# Altium PCB OPG_v8_pcb.PcbDoc (part 2 of 3)
Units mm, origin at the board's own origin, x right, y up, seen from the top; angles counter-clockwise.
Board outline 65 x 95 mm, 2 copper layers (Top Layer, Bottom Layer), stack 0.081 mm thick; 16 components, 17 nets, 129 pads, 66 vias.
Unrouted connection lines stored in the file: 30.
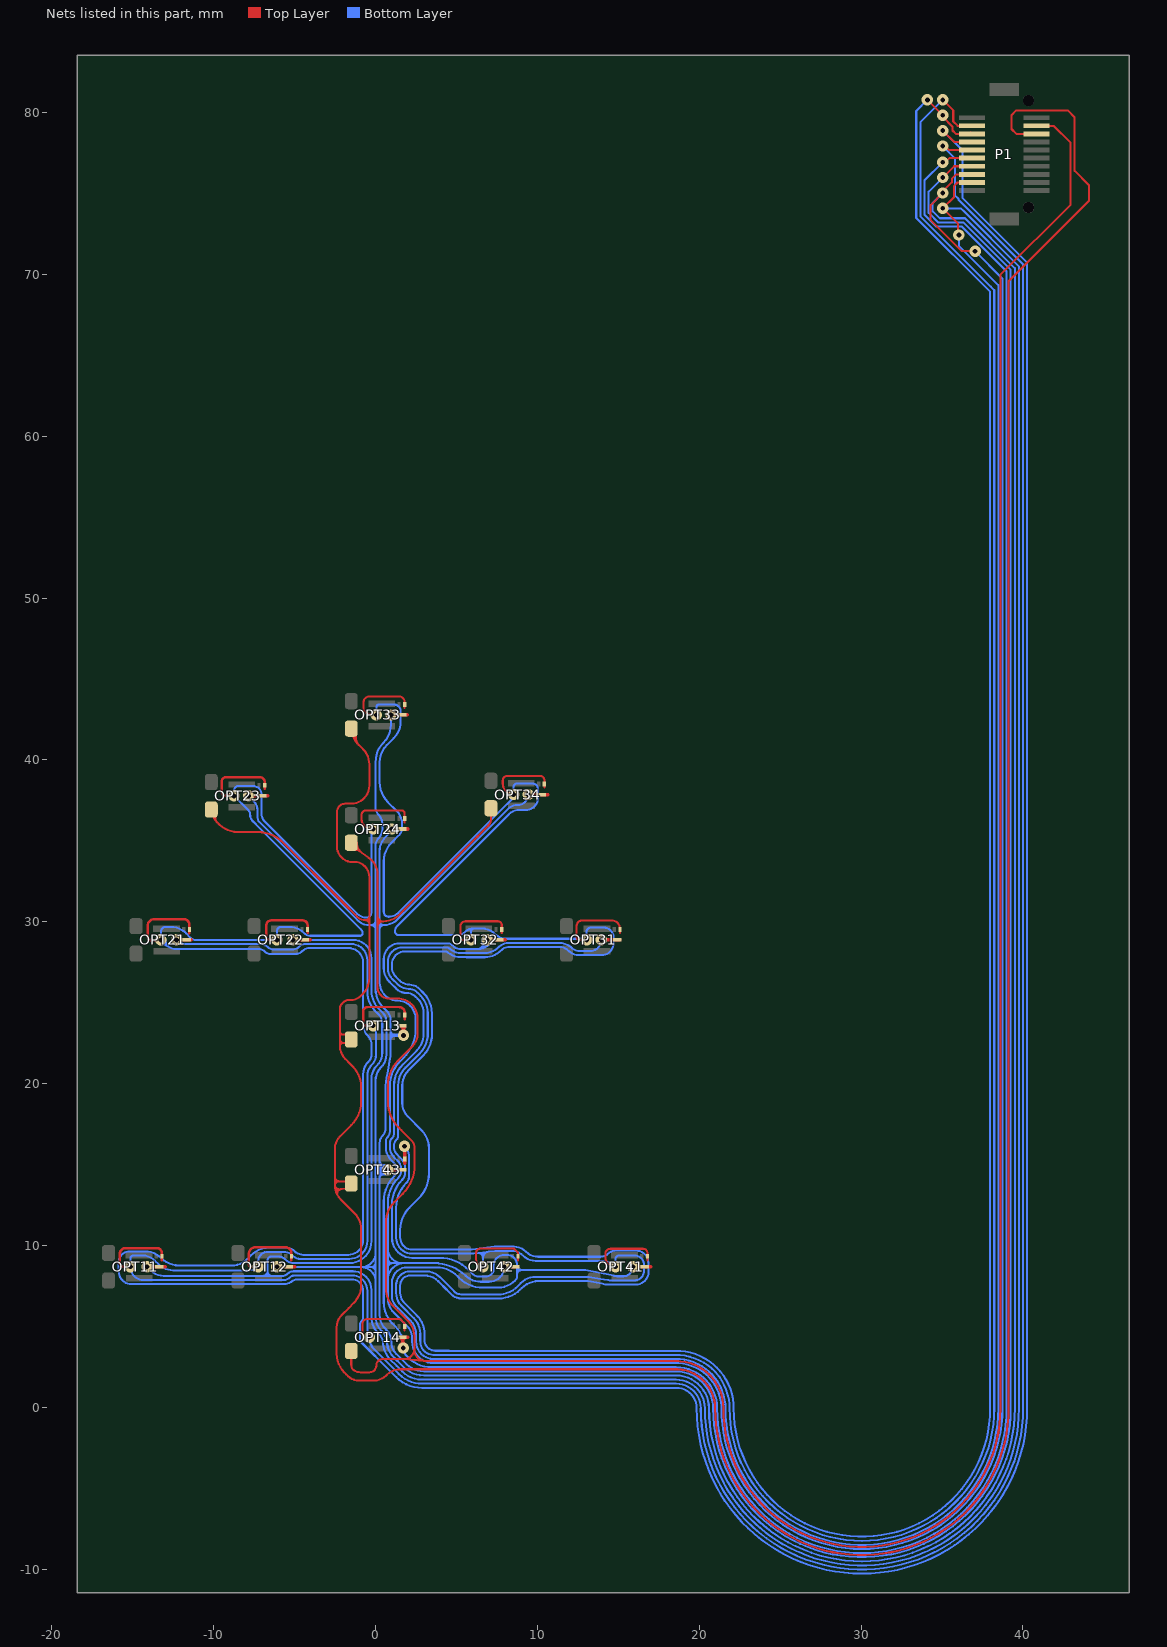
[diagram p2: the nets of this part, all layers, seen from the top]

## Via types
v1: diameter 0.7, hole 0.3, Top Layer to Bottom Layer, 49 vias
v2: diameter 0.7/0.5 (per signal layer), hole 0.3, Top Layer to Bottom Layer, 17 vias

## Nets (pads, with @x,y where several pads share a name; then routed paths per layer and width w, separated by ;. In a path a pad name is that pad's centre, name@x,y a point inside that pad or via, vN(x,y) a via of type N, cw(c..) or ccw(c..) an arc to the next point about the centre after c; other vN are vias at no path point) (continued)
LED_OUT_col3: OPT13.S2 OPT23.S2 OPT33.S2 OPT43.S2 P1.18 | length 209.5
  Top Layer w0.127: OPT23.S2@-10.15,37.03 ccw(c-8.895,37.03) -9.782,36.142 ; OPT23.S2@-9.98,36.86 OPT23.S2@-9.897,36.777 ; OPT23.S2@-9.896,36.592 -9.896,36.416 ccw(c-9.509,36.416) -9.782,36.142 ; -7.039,35.53 cw(c-7.04,35.403) -7.025,35.529 cw(c-7.3,33.301) -6.831,35.496 ; -2.211,16.719 ccw(c-1.5,16.01) -2.504,16.01 -2.504,14.21 ; -2.21,16.72 -1.504,17.426 ; -1.977,25.038 -2.088,24.926 ccw(c-1.819,24.657) -2.2,24.657 -2.2,23.22 ; -1.976,25.039 cw(c-1.682,24.744) -1.682,25.16 -1.515,25.16 ccw(c-1.515,25.969) -0.943,25.397 -0.777,25.563 ccw(c-1.729,26.517) -0.775,25.565 ccw(c-1.729,26.517) -0.381,26.517 -0.381,29.838 ; -1.872,21.522 -1.545,21.194 -1.425,21.075 ; -1.873,21.523 cw(c-1.081,22.314) -2.2,22.314 ; OPT13.S2@-1.74,23.035 -2.016,23.035 ; -1.503,17.427 ccw(c-2.989,18.911) -0.889,18.911 -0.889,19.781 ccw(c-2.719,19.781) -1.424,21.074 ; OPT43.S2@-1.5,13.83 -1.7,13.53 -2.088,13.481 ccw(c-2.088,13.197) -2.158,13.472 ; OPT43.S2@-1.5,13.93 ccw(c-1.577,13.853) -1.577,13.962 -2.256,13.962 ; OPT13.S2@-1.5,22.73 -1.7,22.517 -1.993,22.517 ; OPT33.S2@-1.5,42.03 ccw(c0.045,42.03) -1.204,41.12 ; OPT33.S2@-1.3,41.63 -1.246,41.342 -1.204,41.12 ; OPT33.S2@-1.217,41.65 -1.217,41.347 ccw(c-0.637,41.347) -1.047,40.937 ; -0.617,30.096 cw(c-0.62,30.335) -0.62,30.096 cw(c-0.62,30.615) -0.627,30.096 ; -0.617,30.096 ccw(c-0.62,30.335) -0.381,30.335 ; 0.705,2.006 0.665,1.966 cw(c-0.091,2.719) 0.663,1.964 cw(c-0.091,2.719) -0.091,1.652 -1.034,1.652 cw(c-1.034,2.607) -1.708,1.931 cw(c-1.034,2.607) -1.71,1.933 cw(c-1.034,2.607) -1.712,1.934 -1.813,2.036 -1.914,2.136 cw(c-0.743,3.309) -1.916,2.138 cw(c-0.743,3.309) -2.4,3.309 -2.4,4.928 cw(c-1.278,4.926) -2.071,5.72 -1.667,6.123 -1.34,6.451 ccw(c-2.416,7.535) -1.253,6.545 ccw(c-2.416,7.535) -0.972,7.037 ccw(c-2.416,7.535) -0.916,7.249 ccw(c-2.416,7.535) -0.897,7.376 ccw(c-2.608,7.54) -0.889,7.54 -0.889,11 ccw(c-2.287,11) -1.3,11.99 -2.15,12.84 cw(c-1.295,13.695) -2.371,13.144 ; 0.705,2.006 cw(c1.53,1.181) 1.53,2.347 4.579,2.347 ; 4.585,2.348 17.55,2.347 18.667,2.347 ccw(c18.695,2.471) 18.688,2.344 cw(c18.566,-0.072) 20.985,-0.072 ccw(c30.053,-0.072) 39.121,-0.072 39.121,69.593 44.087,74.559 44.087,75.511 43.201,76.397 43.201,79.695 42.762,80.134 39.597,80.134 39.297,79.834 39.297,78.984 39.597,78.684 P1.18@40.85,78.684 ; -9.782,36.142 -9.65,36.01 ccw(c-8.53,37.13) -8.53,35.546 -7.302,35.546 cw(c-7.3,33.301) -5.71,34.886 -2.074,31.249 -1.135,30.31 ccw(c-0.617,30.828) -0.64,30.096 cw(c-0.64,29.838) -0.627,30.096 ; -2.504,13.714 ccw(c-2.257,13.714) -2.257,13.467 -2.201,13.467 -2.158,13.472 ; -2.504,13.714 cw(c-2.256,13.714) -2.256,13.962 ; -2.504,13.714 -2.504,13.695 ccw(c-1.295,13.695) -2.475,13.432 ; -2.504,13.714 -2.504,13.962 ; -2.504,13.962 -2.504,14.21 ; -2.504,13.962 -2.256,13.962 ; -2.504,14.21 ccw(c-2.256,14.21) -2.256,13.962 ; -2.475,13.432 ccw(c-1.295,13.695) -2.371,13.144 ; -2.475,13.432 -2.312,13.453 ccw(c-2.257,13.352) -2.371,13.352 -2.371,13.197 ; -2.371,13.144 -2.371,13.197 ; -2.371,13.197 cw(c-2.088,13.197) -2.158,13.472 ; -2.2,22.314 cw(c-1.997,22.314) -1.997,22.517 ; -2.2,22.314 -2.2,22.517 ; -2.2,22.517 -2.2,22.723 ; -2.2,22.517 -1.997,22.517 ; -2.2,22.723 ccw(c-1.993,22.723) -1.997,22.517 ; -2.2,22.723 -2.2,22.93 ; -2.2,22.93 cw(c-2.095,22.93) -2.095,23.035 -2.016,23.035 ; -2.2,22.93 -2.2,23.22 ; -2.2,23.22 ccw(c-2.016,23.22) -2.016,23.035 ; -1.997,22.517 ccw(c-1.993,22.723) -1.993,22.517 ; -1.997,22.517 -1.993,22.517 ; -1.204,41.12 ccw(c0.045,42.03) -1.047,40.937 ; -1.047,40.937 -0.772,40.662 cw(c-1.717,39.718) -0.381,39.718 -0.381,38.43 cw(c-1.518,38.43) -0.711,37.629 -0.777,37.563 cw(c-0.867,37.651) -0.784,37.555 cw(c-1.531,38.43) -0.786,37.554 cw(c-1.531,38.43) -1.346,37.295 cw(c-1.365,37.42) -1.365,37.293 -1.886,37.293 ccw(c-1.887,36.796) -2.384,36.796 -2.384,34.655 ccw(c-1.421,34.655) -1.421,33.692 -1.275,33.692 cw(c-1.275,32.86) -0.688,33.449 cw(c-1.425,32.71) -0.686,33.447 cw(c-1.425,32.71) -0.666,33.427 ccw(c-0.574,33.514) -0.656,33.417 cw(c-1.319,32.754) -0.381,32.754 -0.381,30.335 ; -0.627,30.096 cw(c-0.64,29.838) -0.381,29.838 ; -0.381,29.838 -0.381,30.335
LED_OUT_col4: OPT14.S2 OPT24.S2 OPT34.S2 P1.19 | length 188
  Top Layer w0.127: OPT24.S2@-1.555,34.607 -1.554,34.614 -1.514,34.882 OPT24.S2@-1.5,34.98 ; OPT24.S2@-1.547,34.451 -1.307,34.451 cw(c-1.307,33.819) -1.03,34.387 ; OPT14.S2@-1.5,3.58 -1.5,2.618 ccw(c-1.076,2.617) -1.25,2.23 ccw(c-0.924,2.955) -0.923,2.16 ; OPT24.S2@-1.5,34.88 -1.3,34.58 -1.03,34.387 ; OPT24.S2@-1.162,34.887 ccw(c-0.391,34.887) -0.936,34.343 -0.86,34.266 ccw(c-1.307,33.819) -1.03,34.387 ; -0.923,2.16 -0.37,2.16 ccw(c-0.37,2.58) 0.05,2.58 cw(c0.45,2.58) 0.45,2.98 1.75,2.98 ; 1.421,17.29 1.415,17.296 cw(c2.984,18.87) 1.411,17.301 cw(c2.984,18.87) 0.762,18.87 0.762,19.86 cw(c3.014,19.86) 1.381,21.411 ccw(c1.29,21.499) 1.385,21.415 cw(c1.943,20.897) 1.403,21.434 cw(c1.943,20.897) 1.406,21.437 2.284,22.314 ccw(c1.514,23.086) 2.286,22.316 ccw(c1.514,23.086) 2.604,23.086 2.604,24.01 ccw(c1.36,24.01) 2.24,24.89 ; 1.421,17.29 1.587,17.124 2.202,16.509 cw(c1.693,16) 2.413,16 2.413,14.963 cw(c-0.091,14.963) 1.68,13.193 1.157,12.67 ccw(c2.418,11.409) 0.635,11.409 0.635,7.244 ccw(c0.762,7.244) 0.636,7.231 0.639,7.2 cw(c0.513,7.186) 0.639,7.197 ccw(c2.088,7.308) 1.062,6.279 1.494,5.847 ccw(c1.675,6.025) 1.497,5.844 1.57,5.771 1.644,5.698 2.022,5.319 cw(c1.109,4.406) 2.4,4.406 2.4,3.63 ; 2.239,24.89 ccw(c1.36,24.01) 1.836,25.159 cw(c1.886,25.276) 1.832,25.161 ccw(c1.45,24.38) 1.471,25.249 cw(c1.475,25.376) 1.465,25.25 ccw(c1.36,24.01) 1.36,25.254 0.822,25.254 cw(c0.822,25.949) 0.127,25.949 0.127,29.685 ; 6.267,35.234 cw(c6.448,35.056) 6.269,35.236 6.43,35.397 6.965,35.932 ccw(c6.567,36.33) 7.13,36.33 OPT34.S2@7.13,37.01 OPT34.S2@7.13,37.11 ; 18.053,2.864 18.557,2.857 ; P1.19@40.85,79.184 41.892,79.184 42.947,78.129 42.947,74.315 38.613,69.981 38.613,-0.072 cw(c30.053,-0.072) 21.493,-0.072 ccw(c18.566,-0.072) 18.857,2.841 18.725,2.854 ccw(c18.699,2.601) 18.714,2.855 18.557,2.864 17.55,2.864 4.585,2.864 3.067,2.864 ; -1.03,34.387 -0.86,34.266 -0.419,33.952 ; -0.419,33.952 cw(c-1.229,32.811) -0.241,33.802 ; -0.419,33.952 -0.417,33.95 cw(c-1.229,32.811) -0.241,33.802 ; -0.241,33.802 cw(c-1.229,32.811) -0.238,33.799 ; -0.241,33.802 -0.238,33.799 ; -0.238,33.799 cw(c-1.116,32.919) 0.127,32.919 0.127,30.358 ; 0.127,29.685 cw(c0.462,29.685) 0.462,30.02 ; 0.127,29.685 0.127,30.02 ; 0.127,30.02 0.462,30.02 ; 0.127,30.02 0.127,30.358 ; 0.127,30.358 ccw(c0.465,30.358) 0.462,30.02 ; 0.462,30.02 ccw(c0.465,30.358) 0.465,30.02 ; 0.462,30.02 ccw(c0.462,31.448) 0.465,30.02 ; 0.462,30.02 0.465,30.02 ; 0.465,30.02 ccw(c0.465,30.837) 0.479,30.02 ; 0.465,30.02 ccw(c0.462,31.448) 0.479,30.02 ; 0.479,30.02 ccw(c0.462,31.448) 1.472,30.438 5.95,34.916 6.266,35.232 ; 1.75,2.98 ccw(c1.75,3.63) 2.4,3.63 ; 1.75,2.98 2.951,2.875 ; 2.4,3.63 2.4,3.532 ccw(c3.067,3.532) 2.951,2.875 ; 2.951,2.875 ccw(c3.067,3.532) 3.067,2.864 ; 2.951,2.875 3.067,2.864 ; 6.266,35.232 ccw(c5.15,36.35) 6.267,35.234 6.266,35.232
PD_col1: OPT11.D OPT21.D OPT31.D OPT41.D P1.9 | length 384.1
  Top Layer w0.127: v2(36.047,72.434) 36.001,72.48 36.001,73.13 v2(35.047,74.084) 35.747,74.784 35.747,75.469 35.957,75.679 P1.9@36.845,75.679 ; P1.9@36.764,75.598 P1.9@36.845,75.679 ; P1.9@36.85,75.684 P1.9@36.845,75.679
  Top Layer w0.22: v1(-14.118,8.68) OPT11.D@-13.375,8.68 -13,8.68 ; v1(-12.3,28.88) OPT21.D@-11.675,28.88 OPT21.D@-11.4,28.88 ; v1(13.95,28.88) OPT31.D@15.1,28.88 ; v1(15.9,8.68) OPT41.D@16.625,8.68 17,8.68
  Bottom Layer w0.127: v1(-14.118,8.68) -13.875,8.438 ccw(c-13.1,9.213) -13.1,8.116 -6.975,8.116 ; v1(-12.3,28.88) ccw(c-11.672,29.508) -11.672,28.62 -7.119,28.62 cw(c-7.119,27.963) -6.654,28.427 ccw(c-6.296,28.786) -6.296,28.279 -5.15,28.279 ccw(c-5.15,28.872) -4.731,28.453 cw(c-4.312,28.034) -4.312,28.626 -1.51,28.626 cw(c-1.51,27.624) -0.508,27.624 -0.508,25.725 ccw(c1.319,25.725) -0.062,24.529 cw(c-0.159,24.446) -0.047,24.507 0.183,24.277 cw(c-0.373,23.721) 0.414,23.721 0.414,21.916 cw(c-0.726,21.916) 0.08,21.111 ; -6.67,8.13 -6.67,8.361 ; -5.416,8.26 cw(c-5.763,8.607) -5.763,8.116 -6.425,8.116 ; -5.415,8.261 cw(c-5.069,7.913) -5.069,8.404 -1.41,8.404 cw(c-1.41,7.248) -0.254,7.248 -0.254,5.598 ; -0.254,5.597 ccw(c1.222,5.597) -0.183,5.143 ccw(c1.222,5.597) 0.179,4.553 0.197,4.534 cw(c-0.46,3.877) 0.456,4.037 cw(c0.331,4.016) 0.457,4.031 cw(c-0.336,3.939) 0.462,3.939 ccw(c0.716,3.939) 0.47,3.877 cw(c0.347,3.845) 0.473,3.86 ccw(c2.022,4.044) 0.484,3.782 ; 0.08,21.111 ccw(c0.885,20.305) -0.254,20.305 -0.254,10.258 cw(c-1.6,10.258) -1.6,8.912 -5.06,8.912 cw(c-5.06,9.583) -5.535,9.109 ccw(c-6.021,8.623) -5.795,9.272 ccw(c-6.021,8.623) -6.021,9.31 -6.44,9.31 ccw(c-6.44,9.08) -6.67,9.08 -6.67,8.421 ; 0.484,3.781 ccw(c2.022,4.044) 0.876,2.986 cw(c0.782,2.9) 0.884,2.976 1.306,2.554 1.643,2.216 ; 1.04,26.461 cw(c1.712,27.132) 0.762,27.132 0.762,27.526 cw(c1.65,27.526) 1.65,28.414 4.387,28.414 cw(c4.387,28.127) 4.59,28.33 cw(c4.54,28.213) 4.624,28.308 ccw(c5.261,29.011) 5.261,28.063 5.643,28.063 cw(c5.643,27.936) 5.66,28.061 6.698,28.061 ccw(c6.698,29.373) 7.275,28.195 ccw(c6.698,29.373) 7.625,28.446 cw(c8.23,27.841) 8.23,28.696 11.341,28.696 cw(c11.341,27.587) 12.022,28.462 ccw(c12.099,28.563) 12.05,28.446 ccw(c12.655,29.05) 12.655,28.195 13.265,28.195 ccw(c13.265,28.88) v1(13.95,28.88) ; 1.04,26.46 1.37,26.131 ccw(c2.033,26.794) 2.033,25.856 cw(c2.033,25.104) 2.565,25.636 2.785,25.415 ; 1.322,16.562 1.27,16.51 ccw(c1.577,16.203) 1.143,16.203 1.143,16.095 ccw(c1.838,16.095) 1.347,15.603 1.586,15.364 cw(c1.008,14.785) 1.826,14.785 1.826,14.488 cw(c1.218,14.488) 1.649,14.059 ccw(c3.174,12.532) 1.016,12.532 1.016,10.468 ccw(c2.25,10.468) 2.25,9.234 3.946,9.234 cw(c3.946,6.694) 5.742,8.49 5.974,8.259 ccw(c6.375,8.635) 6.375,8.085 6.825,8.085 ccw(c6.825,8.56) 7.3,8.56 7.3,8.764 cw(c7.948,8.764) 7.948,9.412 8.123,9.412 cw(c8.123,8.785) 8.507,9.281 cw(c8.123,8.785) 8.75,8.785 ; 1.323,16.563 ccw(c1.143,16.742) 1.397,16.742 1.397,19.89 cw(c2.957,19.89) 1.853,20.992 cw(c2.957,19.89) 1.855,20.994 2.75,21.89 cw(c2.851,21.813) 2.758,21.899 ccw(c1.451,23.119) 3.226,22.903 3.226,24.352 ccw(c1.722,24.352) 2.786,25.414 ; 1.644,2.216 ccw(c2.864,3.436) 2.865,1.71 ; 2.865,1.71 4.563,1.71 18.568,1.71 cw(c18.568,-0.072) 20.35,-0.072 ccw(c30.053,-0.072) 39.756,-0.072 39.756,70.497 36.367,73.886 36.367,73.889 36.172,74.084 v2(35.047,74.084) ; 5.148,8.012 5.072,8.088 ccw(c3.72,6.736) 3.76,8.648 ccw(c3.745,8.394) 3.745,8.648 1.96,8.648 ccw(c1.96,7.704) 1.016,7.705 1.016,7.249 1.016,6.844 ccw(c1.843,6.844) 1.258,6.26 1.348,6.17 ccw(c2.404,7.07) 1.421,6.091 cw(c1.331,6.001) 1.422,6.09 2.15,5.362 cw(c1.282,4.493) 2.51,4.493 2.51,4.093 ccw(c2.637,4.094) 2.511,4.081 cw(c2.258,4.052) 2.512,4.052 ccw(c3.584,4.052) 2.643,3.54 ccw(c3.584,4.052) 3.561,2.981 4.563,2.981 4.87,2.981 17.506,2.981 18.568,2.981 cw(c18.568,-0.072) 18.606,2.981 18.678,2.981 cw(c18.678,2.727) 18.697,2.98 18.802,2.972 cw(c18.572,-0.067) 21.61,0.183 cw(c18.572,-0.067) 21.612,0.162 21.62,0.057 cw(c21.366,0.038) 21.62,0.039 ; 5.149,8.011 ccw(c6.654,9.517) 6.654,7.388 7.54,7.388 ccw(c7.536,10.09) 7.576,7.388 ccw(c7.546,8.914) 8.625,7.835 ccw(c8.323,8.137) 8.75,8.137 8.75,8.262 ; v1(15.9,8.68) cw(c15.314,8.68) 15.314,8.094 14.921,8.094 14.736,8.124 cw(c14.825,8.68) 14.713,8.128 14.102,8.251 12.97,8.48 9.035,8.48 ; 21.62,0.038 21.62,-0.072 ccw(c30.053,-0.072) 38.486,-0.072 38.486,69.339 36.047,71.779 v2(36.047,72.434) ; -6.975,8.116 ccw(c-6.975,8.421) -6.67,8.421 ; -6.975,8.116 -6.425,8.116 ; -6.67,8.361 ccw(c-6.425,8.361) -6.425,8.116 ; -6.67,8.361 -6.67,8.421 ; 2.786,25.414 ccw(c1.722,24.352) 2.785,25.415 ; 8.75,8.262 cw(c9.045,8.172) 9.035,8.48 ; 8.75,8.262 8.75,8.523 ; 8.75,8.523 ccw(c8.855,8.628) 8.855,8.48 9.035,8.48 ; 8.75,8.523 8.75,8.785 ; 8.75,8.785 ccw(c9.055,8.785) 9.045,8.48 ccw(c9.045,8.172) 9.035,8.48
PD_col2: OPT12.D OPT22.D OPT32.D OPT42.D P1.8 | length 350.8
  Top Layer w0.127: P1.8@36.85,76.184 35.892,76.184 35.613,75.905 35.613,75.695 35.047,75.129 v2(35.047,75.034) 34.297,74.284 34.297,73.349 36.212,71.434 v2(37.047,71.434)
  Top Layer w0.22: v1(-6.1,8.68) OPT12.D@-5.375,8.68 -5,8.68 ; v1(-5.1,28.88) OPT22.D@-4.375,28.88 -4.03,28.88 ; v1(6.9,28.88) 8,28.88 ; v1(7.95,8.68) OPT42.D@8.625,8.68
  Bottom Layer w0.127: v1(-6.1,8.68) -6.078,8.658 -0.898,8.658 ; v1(-5.1,28.88) -1.384,28.88 cw(c-1.384,27.75) -0.254,27.75 -0.254,25.725 ccw(c1.319,25.725) 0.207,24.612 0.437,24.382 cw(c-0.119,23.826) 0.668,23.826 0.668,21.8 cw(c-0.472,21.8) 0.334,20.995 ccw(c1.139,20.189) 0,20.189 0,8.68 ; 0,8.935 cw(c-0.277,8.935) -0.273,8.658 ; 0,9.535 cw(c-0.877,9.535) -0.877,8.658 ; 2.487,25.355 ccw(c1.89,24.757) 1.89,25.602 cw(c1.89,26.447) 1.292,25.849 0.9,26.242 0.881,26.261 0.862,26.28 cw(c1.712,27.132) 0.86,26.282 cw(c1.712,27.132) 0.508,27.132 0.508,27.686 cw(c1.49,27.686) 1.49,28.668 4.413,28.668 cw(c4.413,28.163) 4.77,28.52 ccw(c5.261,29.011) 5.261,28.317 6.336,28.317 ; 2.487,25.355 2.606,25.236 cw(c1.722,24.352) 2.972,24.352 2.972,22.919 cw(c1.451,23.119) 2.575,22.075 2.535,22.035 ; 2.536,22.034 1.676,21.174 ccw(c2.957,19.89) 1.673,21.171 ccw(c2.957,19.89) 1.143,19.89 1.143,16.922 cw(c0.709,16.922) 1.016,16.615 ccw(c1.323,16.309) 0.889,16.309 0.889,16.095 ccw(c1.838,16.095) 1.167,15.424 1.37,15.221 cw(c0.881,14.732) 1.572,14.732 1.572,14.594 cw(c0.963,14.594) 1.394,14.163 ccw(c2.919,12.638) 0.762,12.638 0.762,9.81 ; 5.575,8.125 ccw(c3.618,6.049) 4.396,8.794 cw(c4.433,8.915) 4.394,8.794 ccw(c3.72,6.736) 3.897,8.895 cw(c3.908,9.021) 3.864,8.902 3.23,8.902 1.77,8.902 ; 5.576,8.124 ccw(c6.485,9.054) 6.5,7.754 7.024,7.754 ccw(c7.024,8.68) v1(7.95,8.68) ; v1@6.617,28.93 6.617,28.597 cw(c6.336,28.597) 6.336,28.317 ; v1@6.724,28.713 6.724,28.704 cw(c6.336,28.704) 6.336,28.317 ; v1(6.9,28.88) cw(c6.336,28.88) 6.336,28.317 ; v1@7.148,28.728 7.02,28.6 cw(c6.336,29.283) 6.336,28.317 ; 34.872,73.459 34.427,73.904 34.427,74.414 v2(35.047,75.034) ; 34.882,73.469 36.424,73.469 39.502,70.391 39.502,-0.072 cw(c30.053,-0.072) 20.604,-0.072 ccw(c18.568,-0.072) 18.568,1.964 17.506,1.964 4.563,1.964 3.026,1.964 cw(c3.026,3.826) 2.985,1.965 cw(c2.983,3.723) 1.741,2.478 cw(c2.983,3.723) 1.738,2.481 1.629,2.589 1.173,3.046 1.1,3.119 cw(c2.022,4.044) 1.098,3.121 cw(c2.022,4.044) 0.723,3.909 ccw(c0.597,3.895) 0.716,3.939 ccw(c-0.336,3.939) 0.408,4.683 0.357,4.733 cw(c1.222,5.597) 0,5.597 0,7.76 ; v2(37.047,71.434) 38.74,69.741 38.74,-0.072 cw(c30.053,-0.072) 21.366,-0.072 21.366,0.038 21.364,0.058 ccw(c18.572,-0.067) 18.714,2.723 ccw(c18.568,-0.072) 18.698,2.724 cw(c18.705,2.851) 18.678,2.727 18.605,2.727 ccw(c18.568,-0.072) 18.568,2.727 17.506,2.727 4.626,2.727 3.584,2.727 cw(c3.584,4.052) 2.258,4.052 cw(c3.865,4.253) 2.248,4.345 2.248,4.349 ccw(c1.349,4.349) 2.247,4.403 ccw(c1.349,4.349) 1.985,4.985 1.138,5.832 cw(c2.046,6.74) 0.762,6.74 0.762,7.694 0.762,7.894 ; -0.898,8.658 cw(c-0.898,7.76) 0,7.76 ; -0.898,8.658 -0.877,8.658 ; -0.877,8.658 -0.277,8.658 ; -0.277,8.658 ccw(c-0.277,8.935) -0.273,8.658 ; -0.277,8.658 -0.273,8.658 ; -0.273,8.658 cw(c-0.273,8.385) 0,8.385 ; -0.273,8.658 -0.022,8.658 0,8.68 ; 0,7.76 0,8.385 ; 0,8.385 0,8.68 ; 0.762,7.894 cw(c1.77,7.894) 1.77,8.902 ; 0.762,7.894 0.762,8.639 ; 0.762,8.639 cw(c1.025,8.639) 1.025,8.902 ; 0.762,8.639 0.762,8.902 ; 0.762,8.902 0.762,9.165 ; 0.762,8.902 1.025,8.902 ; 0.762,9.165 ccw(c1.025,9.165) 1.025,8.902 ; 0.762,9.165 0.762,9.81 ; 0.762,9.81 ccw(c1.67,9.81) 1.67,8.902 ; 1.025,8.902 1.67,8.902 ; 1.67,8.902 1.77,8.902
PD_col3: OPT13.D OPT23.D OPT33.D OPT43.D P1.7 | length 195.9
  Top Layer w0.127: OPT13.D@1.49,23.535 cw(c1.49,23.365) v1@1.557,23.209 ; OPT13.D@1.836,23.494 ccw(c1.958,23.375) v1@1.882,23.223 ; v2(35.047,75.984) 35.747,76.684 P1.7@36.85,76.684
  Top Layer w0.22: v1(-7.85,37.78) OPT23.D@-7.025,37.78 -6.675,37.78 ; v1(0.755,14.68) 1.435,14.68 OPT43.D@1.625,14.68 ; v1(0.95,42.78) OPT33.D@1.625,42.78 1.97,42.78 ; OPT13.D@1.625,23.58 1.73,23.58 v1(1.73,22.98)
  Bottom Layer w0.127: v1(-7.85,37.78) -7.532,37.462 ; -7.531,37.461 cw(c-8.089,36.904) -7.301,36.904 -7.301,36.577 ccw(c-6.396,36.577) -7.221,36.206 -1.099,30.084 ccw(c-0.382,30.802) -0.382,29.787 ccw(c-0.381,30.168) -0.379,29.787 ccw(c-0.381,30.168) -0.374,29.787 cw(c-0.372,29.66) -0.371,29.787 ccw(c-0.36,30.65) -0.36,29.787 -0.271,29.787 ; 0.439,16.779 ccw(c0.889,16.331) 0.254,16.331 0.254,15.22 ; 0.44,16.78 ccw(c-0.009,17.229) 0.626,17.229 0.626,19.866 cw(c2.985,19.866) 0.747,20.611 0.904,21.577 ccw(c-0.472,21.8) 0.919,21.72 0.922,21.76 0.922,22.675 ; v1@0.497,14.612 ccw(c0.497,14.369) 0.254,14.369 ; v1@0.5,14.754 cw(c0.5,14.999) 0.254,14.999 ; 0.509,41.092 cw(c0.402,41.161) 0.494,41.073 ccw(c1.728,39.863) 0,39.863 0,37.087 ccw(c0.717,37.087) 0.21,36.58 cw(c-0.297,36.073) 0.42,36.073 0.42,35.699 cw(c-0.297,35.699) 0.21,35.192 ccw(c0.717,34.685) 0,34.685 0,30.058 ; 0.51,41.093 ccw(c-0.555,42.157) 0.95,42.157 v1(0.95,42.78) ; v1@0.566,14.853 0.491,14.853 cw(c0.491,15.09) 0.254,15.09 ; v1@0.583,14.501 0.493,14.501 ccw(c0.493,14.263) 0.254,14.263 ; v1@0.73,14.967 0.507,14.967 cw(c0.507,15.22) 0.254,15.22 ; v1@0.749,14.396 0.51,14.396 ccw(c0.51,14.14) 0.254,14.14 ; v1(0.755,14.68) v1@0.549,14.68 ; 1.278,3.3 cw(c2.022,4.044) 0.97,4.044 ccw(c-0.082,4.044) 0.662,4.788 0.611,4.839 cw(c1.476,5.702) 0.254,5.702 0.254,14.14 ; 1.278,3.3 1.919,2.659 ; 1.92,2.658 ccw(c2.983,3.723) 2.983,2.219 4.82,2.219 17.506,2.219 18.568,2.219 cw(c18.568,-0.072) 20.858,-0.072 ccw(c30.053,-0.072) 39.248,-0.072 39.248,70.286 36.319,73.215 35.157,73.215 35.147,73.205 34.767,73.205 34.173,73.799 34.173,75.11 v2(35.047,75.984) ; -0.271,29.787 cw(c-0.271,29.516) 0,29.516 ; -0.271,29.787 ccw(c-0.271,30.058) 0,30.058 ; -0.271,29.787 -0.182,29.787 ; -0.182,29.787 ccw(c-0.182,29.969) 0,29.969 ; -0.182,29.787 -0.003,29.787 0,29.79 ; 0,29.516 0,29.79 ; 0,29.516 0,25.83 ccw(c1.573,25.83) 0.461,24.718 0.691,24.487 cw(c0.135,23.931) 0.922,23.931 0.922,23.285 ; 0,29.79 0,29.969 ; 0,29.969 0,30.058 ; 0.254,14.14 0.254,14.263 ; 0.254,14.263 0.254,14.369 ; 0.254,14.369 0.254,14.385 ; 0.254,14.385 cw(c0.549,14.385) v1@0.549,14.68 ; 0.254,14.385 0.254,14.96 ; 0.254,14.96 ccw(c0.534,14.96) 0.494,14.683 ccw(c0.534,14.96) 0.534,14.68 v1@0.549,14.68 ; 0.254,14.96 0.254,14.999 ; 0.254,14.999 0.254,15.09 ; 0.254,15.09 0.254,15.22 ; 0.922,22.675 cw(c1.227,22.675) 1.227,22.98 cw(c1.227,23.285) 0.922,23.285 ; 0.922,22.675 0.922,23.285
  Bottom Layer w0.22: 0.3,14.685 0.494,14.683 v1(0.755,14.68) ; 0.968,22.98 1.227,22.98 v1(1.73,22.98)
PD_col4: OPT14.D OPT24.D OPT34.D P1.6 | length 184.7
  Top Layer w0.127: OPT14.D@1.422,4.285 cw(c1.422,4.085) 1.622,4.085 ; v1@1.544,3.894 ccw(c1.349,4.089) 1.625,4.089 OPT14.D@1.625,4.33 ; 1.716,4.083 cw(c1.916,4.083) 1.916,4.283 ; 1.717,4.104 ccw(c1.917,4.104) v1@1.836,3.921 ; v2(35.047,76.934) 35.202,76.934 35.452,77.184 P1.6@36.85,77.184
  Top Layer w0.22: v1(1,35.73) OPT24.D@1.625,35.73 1.975,35.73 ; OPT14.D@1.625,4.33 OPT14.D@1.67,4.33 ; v1(1.715,3.66) 1.67,3.705 OPT14.D@1.67,4.33 ; 2,4.33 OPT14.D@1.67,4.33 ; v1(9.43,37.86) OPT34.D@10.255,37.86 10.63,37.86
  Bottom Layer w0.127: 0.254,30.085 0.254,30.039 ; 0.977,15.255 1.153,15.078 cw(c0.755,14.68) 1.318,14.68 cw(c0.755,14.68) 1.153,14.282 ccw(c2.711,12.724) 0.508,12.724 0.508,6.48 ccw(c2.362,6.48) 1.051,5.169 1.225,4.995 cw(c0.042,3.812) 1.715,3.812 v1(1.715,3.66) ccw(c2.403,3.66) 1.917,3.173 2.01,3.08 ccw(c3.476,4.546) 2.783,2.592 ccw(c3.476,4.546) 3.476,2.473 4.563,2.473 17.506,2.473 18.572,2.473 cw(c18.572,-0.067) 21.112,-0.067 21.112,-0.072 ccw(c30.053,-0.072) 38.994,-0.072 38.994,70.181 36.214,72.961 35.227,72.961 35.217,72.951 34.662,72.951 33.919,73.694 33.919,75.806 v2(35.047,76.934) ; 0.976,15.256 cw(c1.801,16.08) 0.635,16.08 0.635,16.42 cw(c1.053,16.42) 0.757,16.716 ccw(c0.462,17.012) 0.88,17.012 0.88,19.866 cw(c2.985,19.866) 0.916,20.255 cw(c2.985,19.866) 1.297,21.123 cw(c2.957,19.89) 1.497,21.354 1.504,21.361 ccw(c1.413,21.451) 1.523,21.387 1.733,21.597 ccw(c-0.063,23.393) 2.477,23.393 2.477,24.015 ; v1(1,35.73) 1,35.623 0.627,35.25 ccw(c1.528,34.349) 0.259,34.466 cw(c0.133,34.479) 0.258,34.457 ccw(c0.508,34.411) 0.254,34.411 0.254,30.039 ; 2.141,24.809 ccw(c1.366,24.034) 1.366,25.13 cw(c1.366,26.242) 0.657,25.386 cw(c1.366,26.242) 0.51,25.533 cw(c1.366,26.242) 0.254,26.237 cw(c1.366,26.242) 0.254,26.242 0.254,29.541 ; 2.142,24.808 cw(c1.346,24.015) 2.47,24.015 ; v1(9.43,37.86) cw(c8.783,37.86) 8.783,37.213 ccw(c8.783,36.296) 8.277,37.061 ccw(c8.783,36.296) 8.266,37.053 8.236,37.023 cw(c8.056,37.202) 8.235,37.022 2.226,31.013 1.355,30.143 cw(c0.503,30.995) 0.503,29.79 ; 0.254,29.541 cw(c0.503,29.541) 0.503,29.79 ; 0.254,29.541 0.254,29.79 ; 0.254,29.79 0.503,29.79 ; 0.254,29.79 0.254,30.039 ; 0.254,30.039 ccw(c0.503,30.039) 0.503,29.79
PD_Gate_row1: OPT11.G OPT12.G OPT13.G OPT14.G P1.5 | length 204
  Top Layer w0.127: v1@-0.398,4.342 cw(c-0.48,4.661) -0.81,4.661 -0.81,5.16 cw(c-0.526,5.16) -0.526,5.444 1.486,5.444 cw(c1.486,5.317) 1.575,5.407 1.748,5.234 cw(c1.658,5.144) 1.763,5.216 ; 1.764,5.215 cw(c1.673,5.126) 1.8,5.126 OPT14.G@1.8,4.98 1.8,4.73 ; v2(35.047,77.934) 35.202,77.934 35.452,77.684 P1.5@36.85,77.684
  Top Layer w0.15: v1(-15.15,8.68) -15.596,8.68 cw(c-15.596,8.884) -15.8,8.884 -15.8,9.48 cw(c-15.45,9.48) -15.45,9.83 -13.5,9.83 cw(c-13.5,9.53) -13.2,9.53 OPT11.G@-13.2,9.33 -13.2,9.08 ; v1(-7.25,8.68) -7.695,8.68 cw(c-7.695,8.81) -7.825,8.81 -7.825,9.505 cw(c-7.45,9.505) -7.45,9.88 -5.55,9.88 cw(c-5.55,9.53) -5.2,9.53 OPT12.G@-5.2,9.33 -5.2,9.08 ; v1(-0.15,23.58) -0.58,23.58 cw(c-0.58,23.76) -0.76,23.76 -0.76,24.47 cw(c-0.5,24.47) -0.5,24.73 1.45,24.73 cw(c1.45,24.38) 1.8,24.38 OPT13.G@1.8,24.23 1.8,23.98
  Bottom Layer w0.127: -5.311,8.006 cw(c-5.658,8.353) -5.658,7.862 -14.332,7.862 cw(c-14.332,8.68) v1(-15.15,8.68) -15.15,9.18 cw(c-14.95,9.18) -14.95,9.38 -14.4,9.38 cw(c-14.4,8.294) -13.632,9.062 -13.401,8.831 ccw(c-12.505,9.727) -12.505,8.46 -7.781,8.46 ccw(c-7.781,9.211) v1(-7.25,8.68) -7.25,9.03 cw(c-6.675,9.03) -7.082,9.436 cw(c-6.675,9.03) -6.675,9.605 -5.69,9.605 cw(c-5.69,8.856) -5.16,9.386 ccw(c-4.63,9.915) -4.63,9.166 -1.62,9.166 ccw(c-1.62,10.278) -0.508,10.278 -0.508,20.464 cw(c0.505,20.464) -0.211,21.18 ccw(c-0.884,21.79) 0.024,21.79 0.024,23.16 ccw(c-0.57,23.16) v1(-0.15,23.58) ; -5.31,8.007 cw(c-4.963,7.659) -4.963,8.15 -1.458,8.15 cw(c-1.458,7.2) -0.508,7.2 -0.508,4.864 -0.505,4.861 -0.505,4.44 v1(-0.395,4.33) ccw(c0.653,4.33) -0.088,3.589 1.468,2.032 ; 1.43,2.07 1.462,2.038 ccw(c2.864,3.436) 1.468,2.032 ; 4.707,1.456 4.563,1.456 ; v2(35.047,77.934) 35.797,77.184 35.797,74.889 36.023,74.663 36.023,74.609 39.791,70.841 40.01,70.622 40.01,-0.072 cw(c30.053,-0.072) 20.096,-0.072 ccw(c18.569,-0.072) 18.569,1.456 4.563,1.456 ; 1.468,2.032 ccw(c2.864,3.436) 2.866,1.456 2.895,1.456 cw(c2.895,1.329) 2.897,1.456 ccw(c2.938,3.178) 2.938,1.456 4.563,1.456
PD_Gate_row2: OPT21.G OPT22.G OPT23.G OPT24.G P1.4 | length 270.6
  Top Layer w0.127: v1(-0.144,35.73) -0.247,35.73 cw(c-0.247,36.343) -0.86,36.343 -0.86,36.615 cw(c-0.595,36.615) -0.595,36.88 1.6,36.88 cw(c1.6,36.68) 1.8,36.68 OPT24.G@1.8,36.38 1.8,36.135 ; v2(35.047,78.884) 35.747,78.184 P1.4@36.85,78.184
  Top Layer w0.15: v1(-13.27,28.88) cw(c-13.29,28.88) -13.29,28.86 -13.85,28.86 cw(c-13.85,29.09) -14.08,29.09 -14.08,29.74 cw(c-13.66,29.74) -13.66,30.16 -11.86,30.16 cw(c-11.86,29.8) -11.5,29.8 OPT21.G@-11.5,29.53 -11.5,29.285 ; v1(-8.75,37.78) -9.26,37.78 cw(c-9.26,38.02) -9.5,38.02 -9.5,38.68 cw(c-9.25,38.68) -9.25,38.93 -7.146,38.93 cw(c-7.146,38.634) -6.85,38.634 OPT23.G@-6.85,38.43 -6.85,38.205 ; v1(-6.1,28.88) -6.583,28.88 cw(c-6.583,29.017) -6.68,28.92 cw(c-6.511,29.089) -6.75,29.089 -6.75,29.78 cw(c-6.45,29.78) -6.45,30.08 -4.5,30.08 cw(c-4.5,29.78) -4.2,29.78 OPT22.G@-4.2,29.53 -4.2,29.305
  Bottom Layer w0.127: v1@-13.263,28.591 -13.126,28.591 cw(c-13.126,28.144) -12.933,28.547 ; -12.988,28.598 v1(-13.27,28.88) ccw(c-13.27,28.9) -13.25,28.9 -13.25,29.405 cw(c-12.975,29.405) -12.975,29.68 -12.664,29.68 cw(c-12.666,28.314) -11.7,29.28 -11.441,29.021 ccw(c-11.1,29.363) -11.1,28.88 -7.126,28.88 v1(-6.1,28.88) -6.1,29.42 cw(c-5.84,29.42) -5.84,29.68 -5.32,29.68 cw(c-5.32,28.425) -4.432,29.312 ccw(c-3.992,29.752) -4.063,29.134 -0.946,29.134 ccw(c-0.946,29.28) -0.8,29.28 ccw(c-1.152,29.28) -0.903,29.529 -2.23,30.856 -7.399,36.024 cw(c-7.221,36.206) -7.402,36.028 ; -12.988,28.598 ccw(c-12.308,29.278) -12.934,28.548 ccw(c-12.308,29.278) -12.933,28.547 ; v1@-12.979,28.897 -12.979,28.868 ccw(c-12.402,28.868) -12.81,28.46 ccw(c-13.126,28.144) -12.933,28.547 ; -5.205,7.752 ccw(c-5.171,7.63) -5.242,7.735 cw(c-5.658,8.353) -5.658,7.608 -15.078,7.608 cw(c-15.078,8.399) -15.869,8.399 -15.869,8.967 cw(c-15.202,8.967) -15.202,9.634 -14.249,9.634 cw(c-14.249,8.222) -13.251,9.221 ccw(c-12.139,10.332) -12.139,8.76 -8.882,8.76 ccw(c-8.882,10.117) -7.923,9.157 -7.663,9.417 cw(c-6.597,8.352) -6.899,9.828 ccw(c-6.926,9.952) -6.894,9.83 cw(c-6.675,9.03) -6.675,9.859 -5.535,9.859 cw(c-5.535,9.109) -5.005,9.639 ccw(c-4.475,10.169) -4.475,9.42 -1.68,9.42 ccw(c-1.68,10.338) -0.762,10.338 -0.762,20.576 cw(c0.324,20.576) -0.554,21.215 cw(c-0.452,21.14) -0.542,21.229 ccw(c-1.267,21.948) -0.444,21.343 ccw(c-0.919,21.818) -0.247,21.818 -0.247,21.89 cw(c-0.12,21.889) -0.247,21.895 ccw(c-1.267,21.948) -0.246,21.948 ccw(c-0.928,21.948) -0.247,21.99 cw(c-0.12,21.997) -0.247,21.995 -0.247,22.376 ccw(c-1.096,22.376) -0.495,22.975 ; -5.205,7.753 cw(c-4.858,7.405) -4.858,7.896 -1.458,7.896 cw(c-1.458,7.2) -0.762,7.2 -0.762,5.583 cw(c-1.148,5.583) -0.875,5.31 ccw(c-0.646,5.081) -0.97,5.081 -0.97,4.256 ccw(c-0.611,4.256) -0.865,4.003 0.889,2.249 1.255,1.883 ccw(c1.344,1.974) 1.259,1.879 1.283,1.858 cw(c1.199,1.762) 1.288,1.853 ccw(c2.864,3.436) 2.864,1.202 2.893,1.202 ccw(c2.938,3.178) 2.938,1.202 4.563,1.202 18.569,1.202 cw(c18.569,-0.072) 19.842,-0.072 ccw(c30.053,-0.072) 40.264,-0.072 40.264,70.727 36.277,74.714 36.277,77.654 v2(35.047,78.884) ; -4.516,28.193 cw(c-4.947,28.625) -4.947,28.014 -6.492,28.014 cw(c-6.492,28.53) -6.857,28.166 ccw(c-7.221,27.801) -7.221,28.317 -12.308,28.317 cw(c-12.308,29.278) -12.933,28.547 ; -4.515,28.194 cw(c-4.084,27.762) -4.084,28.372 -1.654,28.372 cw(c-1.654,27.48) -0.762,27.48 -0.762,23.618 ccw(c0.146,23.618) -0.496,22.976 ; v1(-0.144,35.73) ccw(c0.123,35.463) -0.254,35.463 -0.254,30.581 cw(c-0.575,30.581) -0.575,30.26 cw(c-0.575,31.045) -1.13,30.49 -6.892,36.252 cw(c-6.515,36.63) -7.047,36.578 -7.047,37.867 ccw(c-7.57,37.867) -7.57,38.39 -8.45,38.39 ccw(c-8.45,38.09) -8.75,38.09 v1(-8.75,37.78) -7.853,36.883 cw(c-8.1,36.635) -7.75,36.635 ccw(c-7.124,36.635) -7.567,36.193 -7.475,36.101 ; -7.475,36.101 -7.403,36.028 ; -7.475,36.101 -7.403,36.028
PD_Gate_row3: OPT31.G OPT32.G OPT33.G OPT34.G P1.3 | length 283.9
  Top Layer w0.127: v1(0.05,42.78) -0.02,42.85 -0.39,42.85 cw(c-0.39,43.21) -0.75,43.21 -0.75,43.53 cw(c-0.35,43.53) -0.35,43.93 1.44,43.93 cw(c1.44,43.57) 1.8,43.57 OPT33.G@1.8,43.43 1.8,43.21 ; v1(5.9,28.88) 5.43,28.88 cw(c5.43,29.06) 5.25,29.06 5.25,29.73 cw(c5.55,29.73) 5.55,30.03 7.55,30.03 cw(c7.55,29.78) 7.8,29.78 OPT32.G@7.8,29.53 7.8,29.305 ; v1(8.53,37.86) cw(c8.53,38.53) 7.86,38.53 7.86,38.733 cw(c8.137,38.733) 8.137,39.01 10.18,39.01 cw(c10.18,38.76) 10.43,38.76 OPT34.G@10.43,38.51 10.43,38.285 ; v1(13.05,28.88) 12.6,28.88 cw(c12.6,29.05) 12.43,29.05 12.43,29.74 cw(c12.77,29.74) 12.77,30.08 14.602,30.08 cw(c14.602,29.58) OPT31.G@15.101,29.62 ; 15.1,29.31 OPT31.G@15.1,29.53 ; v2(34.097,80.784) v2(35.047,79.834) 35.047,79.735 35.653,79.129 35.653,78.893 35.862,78.684 P1.3@36.85,78.684 P1.3@36.764,78.771
  Bottom Layer w0.127: v1(0.05,42.78) 0.05,43.25 cw(c0.23,43.25) 0.23,43.43 1.113,43.43 cw(c1.113,42.993) 1.55,42.993 1.55,42.382 cw(c0.073,42.382) 1.118,41.338 0.686,40.906 ccw(c1.728,39.863) 0.254,39.863 0.254,38.63 ccw(c2.002,38.63) 0.766,37.394 1.295,36.865 cw(c0.461,36.032) 1.64,36.032 1.64,35.788 cw(c1.051,35.788) 1.468,35.371 ; 1.467,35.371 0.988,34.891 ccw(c2.146,33.733) 0.508,33.733 0.508,30.61 ccw(c0.808,30.61) 0.808,30.31 0.825,30.31 ccw(c0.825,31.127) 1.402,30.549 8.056,37.202 cw(c8.236,37.024) 8.057,37.204 8.131,37.278 8.4,37.547 ccw(c8.088,37.86) v1(8.53,37.86) 8.53,38.329 cw(c8.741,38.329) 8.741,38.54 9.7,38.54 cw(c9.7,38.21) 10.03,38.21 10.03,37.64 cw(c9.3,37.64) 9.97,37.35 cw(c9.3,37.64) 9.59,36.97 cw(c9.3,37.64) 9.3,36.91 8.884,36.91 ccw(c8.884,36.008) 8.246,36.646 1.334,29.734 ccw(c1.659,29.41) 1.2,29.41 ccw(c1.44,29.41) 1.44,29.17 1.483,29.17 5.031,29.17 ccw(c5.031,29.904) 5.55,29.385 cw(c6.021,28.914) 5.784,29.536 ; 2.697,25.863 2.965,25.595 cw(c1.722,24.352) 2.967,25.593 cw(c1.722,24.352) 3.48,24.352 3.48,22.905 cw(c3.226,22.903) 3.48,22.902 cw(c3.226,22.903) 3.478,22.873 cw(c1.451,23.119) 2.948,21.73 cw(c2.75,21.89) 2.931,21.711 cw(c2.75,21.89) 2.929,21.709 2.034,20.814 ccw(c2.957,19.89) 1.651,19.89 1.651,18.79 ccw(c2.81,18.79) 1.991,17.971 2.84,17.121 cw(c1.726,16.006) 3.302,16.006 3.302,14.47 cw(c1.062,14.47) 2.647,12.887 2.085,12.325 ccw(c3.439,10.971) 1.524,10.971 1.524,10.485 ccw(c2.266,10.485) 2.266,9.742 5.961,9.742 7.35,9.92 8.55,9.92 cw(c8.55,8.862) 9.298,9.61 ccw(c10.046,10.358) 10.046,9.3 13.913,9.3 ccw(c13.913,9.949) 14.371,9.489 ; 2.697,25.863 ccw(c2.1,25.265) 2.1,26.11 cw(c2.1,26.955) 1.503,26.357 1.259,26.601 cw(c1.847,27.188) 1.016,27.188 1.016,27.376 cw(c1.8,27.376) 1.8,28.16 2.4,28.16 4.352,28.16 cw(c4.351,28.033) 4.43,28.132 ccw(c4.59,28.33) 4.46,28.112 cw(c4.394,28.003) 4.476,28.1 ccw(c5.261,29.011) 5.261,27.809 5.636,27.809 ; 4.125,7.536 4.05,7.61 3.875,7.786 ccw(c3.02,6.931) 3.02,8.14 2.139,8.14 ccw(c2.139,7.488) 1.796,8.042 ccw(c1.863,7.935) 1.794,8.041 ccw(c2.124,7.54) 1.524,7.54 1.524,7.07 ccw(c2.404,7.07) 1.782,6.448 2.486,5.744 2.548,5.682 cw(c1.418,4.549) 2.551,5.679 2.62,5.61 ccw(c2.732,5.67) 2.635,5.588 cw(c1.418,4.549) 3.013,4.681 3.018,4.654 3.018,4.568 cw(c1.192,4.45) 3.021,4.495 3.03,4.15 ccw(c3.689,4.15) 3.689,3.491 4.541,3.491 17.506,3.49 18.57,3.489 cw(c18.568,-0.072) 18.576,3.489 18.679,3.489 cw(c18.678,2.727) 18.737,3.486 18.84,3.479 cw(c18.572,-0.067) 22.118,0.2 22.126,0.097 cw(c21.366,0.038) 22.128,0.038 22.128,-0.072 ccw(c30.053,-0.072) 37.978,-0.072 37.978,68.916 33.411,73.483 33.411,80.098 v2(34.097,80.784) ; 4.126,7.535 4.17,7.491 4.684,6.977 ccw(c5.29,7.584) 5.29,6.726 5.309,6.726 cw(c5.308,6.599) 5.327,6.725 ccw(c5.386,7.096) 5.386,6.72 7.595,6.72 ccw(c7.595,8.639) 8.952,7.282 9.031,7.361 cw(c10.091,6.302) 10.091,7.8 13.14,7.8 13.998,7.633 14.184,7.597 ccw(c14.302,8.205) 14.302,7.586 16.09,7.586 ccw(c16.09,8.366) 16.87,8.366 16.87,8.78 ccw(c16,8.78) 16.863,8.888 ccw(c16,8.78) 16.851,8.963 cw(c16.968,8.987) 16.848,8.978 ccw(c16.1,8.93) 16.7,9.38 ccw(c16.1,8.93) 16.55,9.53 ccw(c16.1,8.93) 16.1,9.68 14.831,9.68 ccw(c14.831,9.031) 14.372,9.49 ; 5.636,27.807 6.762,27.807 ccw(c6.762,29.099) 7.362,27.955 cw(c7.42,27.842) 7.366,27.957 ccw(c6.698,29.373) 7.804,28.265 cw(c8.23,27.841) 7.937,28.365 7.942,28.368 cw(c8.295,27.567) 8.295,28.442 11.341,28.442 cw(c11.341,27.587) 11.945,28.192 ccw(c12.55,28.796) 12.55,27.941 13.97,27.941 ccw(c13.97,28.671) 14.7,28.671 14.7,29.043 ccw(c14.107,29.043) 14.107,29.637 13.305,29.637 ccw(c13.305,29.361) 13.031,29.336 13.031,29.335 v1(13.05,28.88) 12.98,28.95 8.123,28.95 cw(c8.123,30.025) 7.363,29.265 ; v1@5.83,28.88 v1(5.9,28.88) 5.9,29.38 ; 7.362,29.265 ccw(c6.602,28.505) 6.602,29.58 6.1,29.58 ; 5.784,29.536 cw(c6.021,28.914) 6.021,29.58 6.1,29.58 ; 5.784,29.536 cw(c5.784,29.42) 5.9,29.42 5.9,29.38 ; 5.9,29.38 cw(c6.1,29.38) 6.1,29.58
PD_Gate_row4: OPT41.G OPT42.G OPT43.G P1.2 | length 189.7
  Top Layer w0.127: v1(6.644,8.68) cw(c6.644,9.104) 6.22,9.104 6.22,9.547 cw(c6.473,9.547) 6.473,9.8 8.508,9.8 cw(c8.508,9.673) 8.597,9.763 8.763,9.598 cw(c8.673,9.508) 8.8,9.508 OPT42.G@8.8,9.33 8.8,9.085 ; v1(14.825,8.68) cw(c14.825,9.308) 14.748,8.685 cw(c14.825,9.308) 14.201,9.232 cw(c14.825,9.308) 14.197,9.308 14.197,9.481 cw(c14.509,9.481) 14.509,9.794 16.538,9.794 cw(c16.538,9.532) 16.8,9.532 OPT41.G@16.8,9.33 16.8,9.08 ; v2(35.047,80.784) 35.697,80.134 35.697,79.451 35.967,79.181 36.847,79.181 P1.2@36.85,79.184 P1.2@36.82,79.214
  Top Layer w0.2: v1(1.788,16.127) 1.8,16.115 OPT43.G@1.8,15.33 1.8,15.08
  Bottom Layer w0.127: v1(1.788,16.127) cw(c1.081,15.421) 2.08,15.421 2.08,14.288 cw(c1.472,14.288) 1.903,13.859 ccw(c3.428,12.332) 1.27,12.332 1.27,10.485 ccw(c2.266,10.485) 2.266,9.488 6.066,9.488 6.355,9.527 ; v1(6.644,8.68) 6.644,9.237 ; v2(35.047,80.784) 33.665,79.402 33.665,73.588 38.017,69.237 38.232,69.021 38.232,-0.072 cw(c30.053,-0.072) 21.874,-0.072 21.874,0.038 ccw(c21.366,0.038) 21.873,0.077 21.865,0.181 ccw(c18.572,-0.067) 18.821,3.225 18.717,3.233 ccw(c18.678,2.727) 18.678,3.235 18.608,3.235 ccw(c18.568,-0.072) 18.569,3.235 17.506,3.235 4.87,3.236 4.563,3.236 3.557,3.236 cw(c3.558,3.363) 3.554,3.236 cw(c3.584,4.052) 2.766,4.051 ccw(c2.258,4.052) 2.764,4.1 2.764,4.549 ccw(c1.418,4.549) 2.366,5.505 1.602,6.269 cw(c2.404,7.07) 1.27,7.07 1.27,7.54 cw(c2.124,7.54) 2.124,8.394 3.145,8.394 cw(c3.145,7.233) 3.966,8.054 4.863,7.157 ccw(c5.29,7.584) 5.29,6.98 7.732,6.98 ccw(c7.731,7.107) 7.741,6.98 ccw(c7.595,8.639) 8.093,7.05 ccw(c7.595,8.639) 8.65,7.351 ccw(c8.569,7.449) 8.658,7.358 8.97,7.67 cw(c9.897,6.743) 9.897,8.054 9.985,8.054 10.344,8.054 13.14,8.054 cw(c13.14,7.8) 13.181,8.051 14.105,7.898 14.38,7.852 ccw(c14.529,8.753) 14.529,7.84 15.985,7.84 ccw(c15.985,8.455) 16.6,8.455 16.6,8.78 ccw(c16,8.78) 16,9.38 15.05,9.38 ccw(c15.05,9.155) 14.825,9.155 v1(14.825,8.68) ccw(c13.941,7.796) 14.382,8.966 ccw(c13.941,7.796) 13.941,9.046 9.878,9.046 cw(c9.878,10.104) 9.13,9.356 ccw(c8.382,8.608) 8.382,9.666 7.429,9.666 ccw(c7.429,9.412) 7.396,9.664 7.022,9.614 ; 6.355,9.527 cw(c6.355,9.237) 6.644,9.237 ; 6.355,9.527 6.644,9.565 ; 6.644,9.237 cw(c7.022,9.237) 6.924,9.602 ; 6.644,9.237 6.644,9.565 ; 6.644,9.565 6.648,9.565 6.924,9.602 ; 6.924,9.602 cw(c7.022,9.237) 7.022,9.614 ; 6.924,9.602 7.022,9.614